# Altium PCB PCB_IOT_VER.1.1.1.PcbDoc
Units mm, origin at the board's own origin, x right, y up, seen from the top; angles counter-clockwise.
Board outline 201.68 x 192.66 mm, 2 copper layers (Top Layer, Bottom Layer); 82 components, 85 nets, 277 pads, 2 vias.
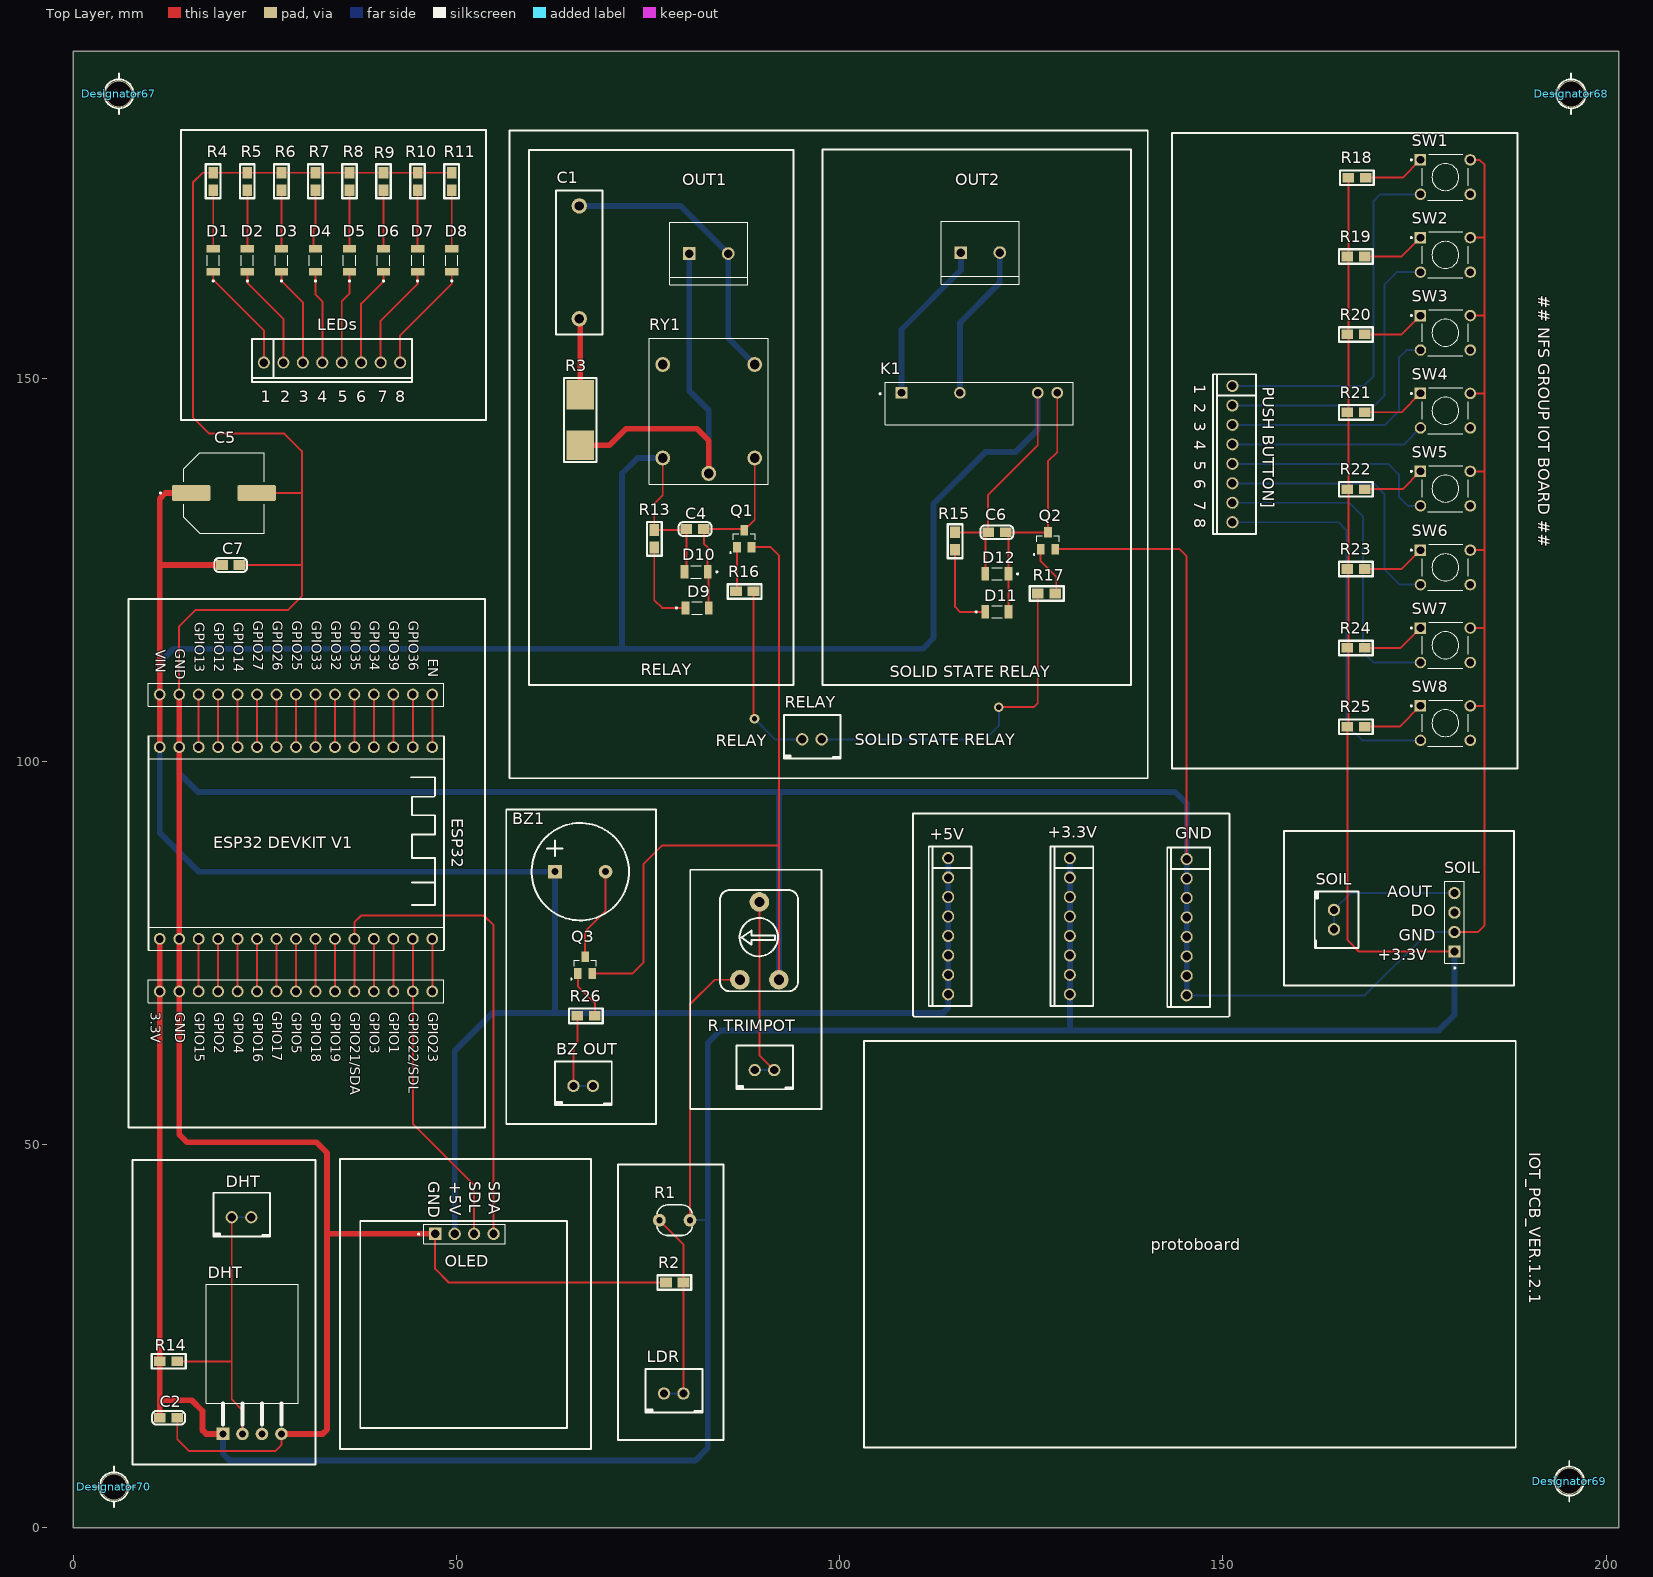
[diagram p0: Top Layer view]
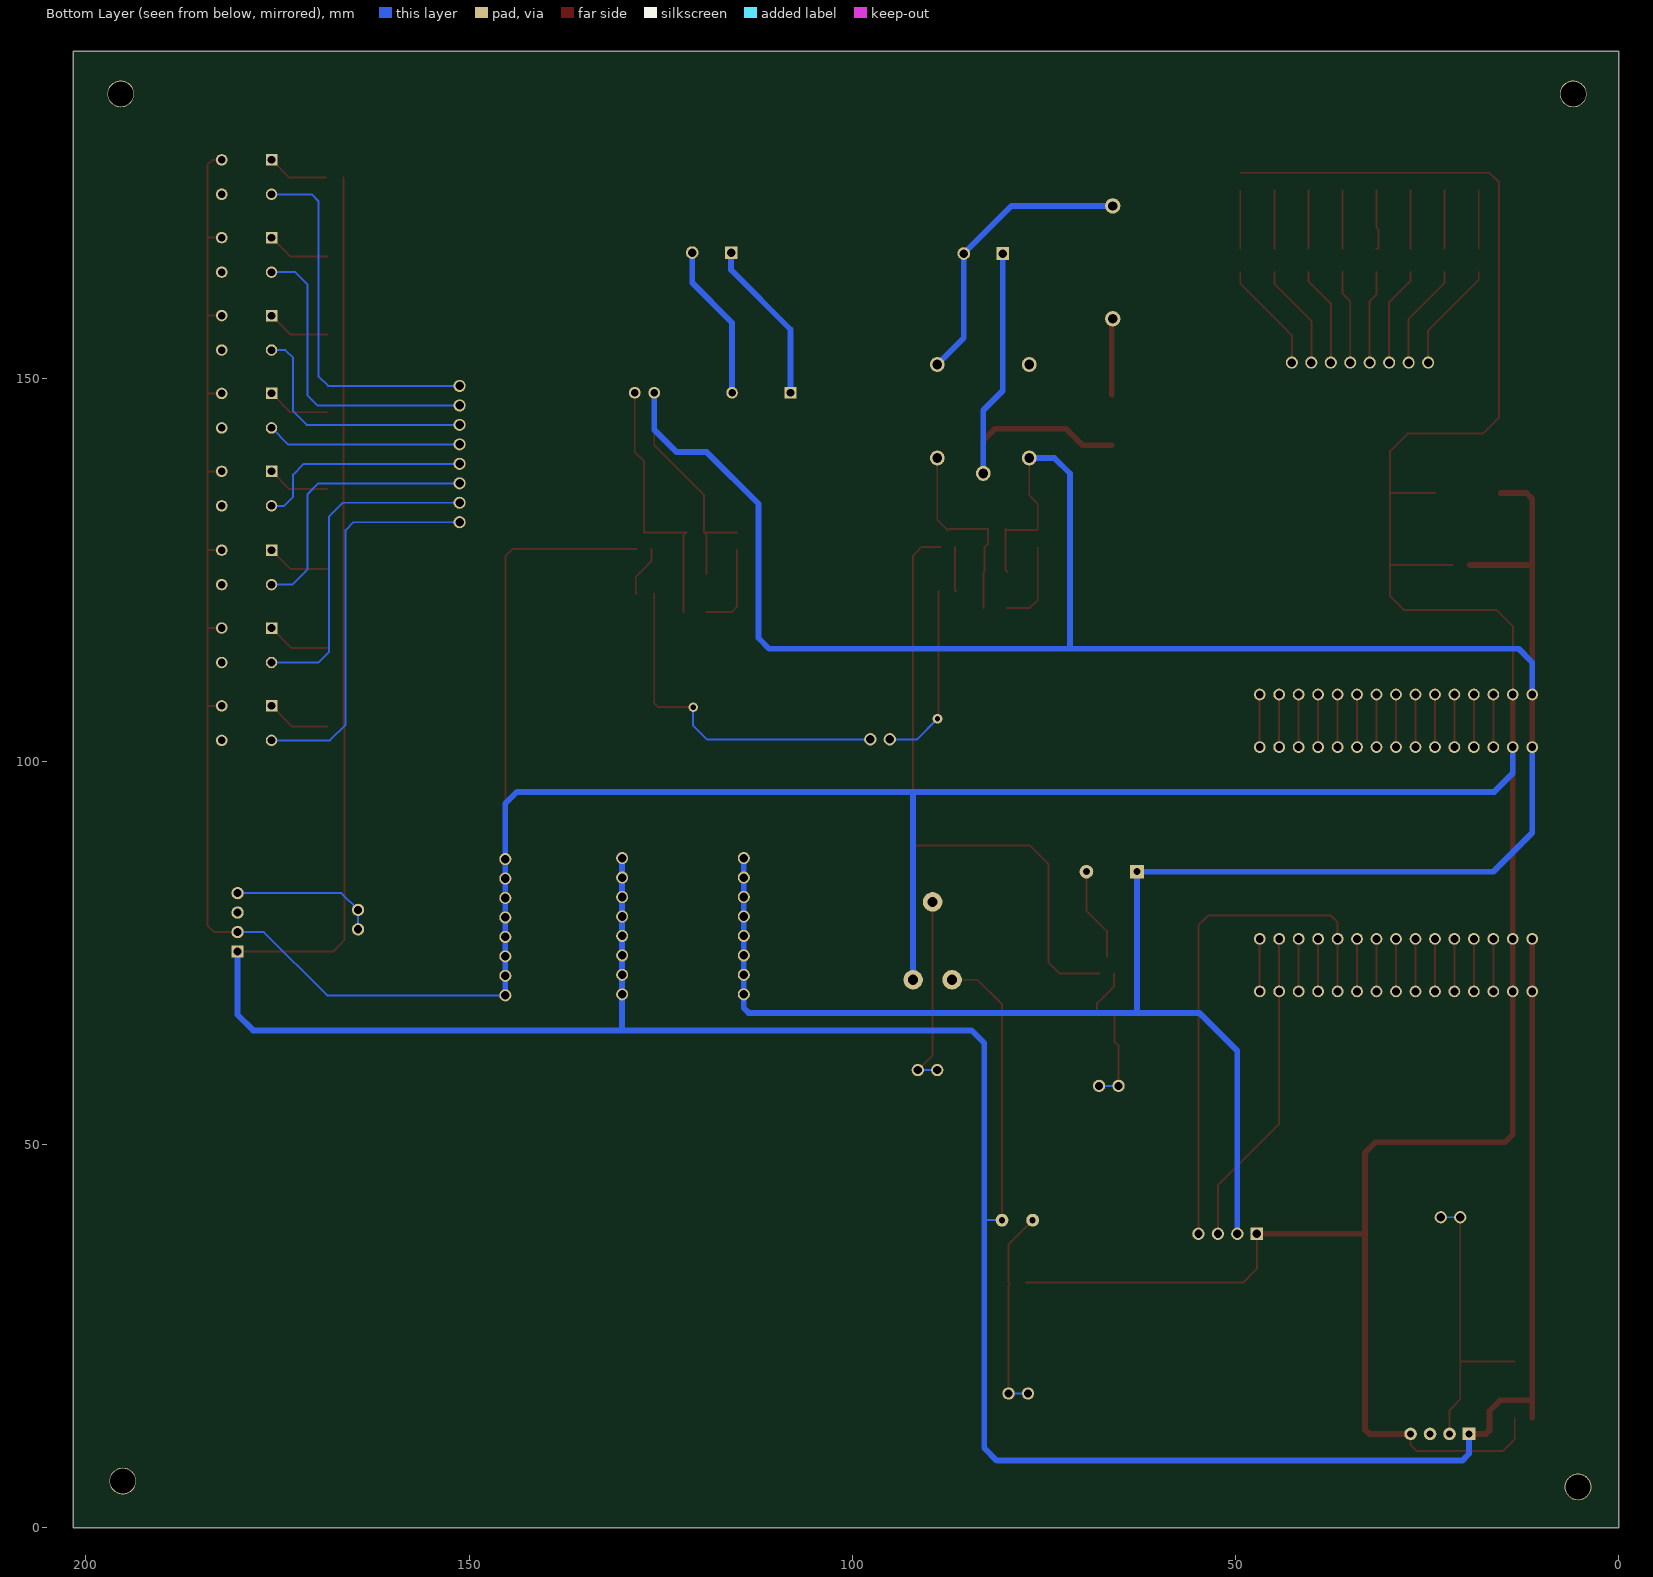
[diagram p1: Bottom Layer view, seen from below]

## Layer stack, top to bottom
Top Solder: solder mask 0.0102, Solder Resist, Dk 3.5
Top Layer: signal copper 0.0356
Dielectric 1: dielectric 0.32, FR-4, Dk 4.8
Bottom Layer: signal copper 0.0356
Bottom Solder: solder mask 0.0102, Solder Resist, Dk 3.5

## Board outline
0,0 201.676,0 201.676,192.659 0,192.659

## Design rules (kind name [scope] priority, off if disabled: settings)
Clearance [All] p1: gap=0.254 ignorepadtopadclearanceinfootprint=FALSE except(0: Arc-Hole Track-Hole SMDPad-Hole THPad-Hole Via-Hole Fill-Hole Poly-Hole Region-Hole Text-Hole)
PolygonConnect [All] p1: connectstyle=Relief reliefconductorwidth=0.254 reliefentries=4 polygonreliefangle="90 Angle" airgapwidth=0.254
RoutingVias [All] p1: holewidth=0.711 width=1.27 viastyle="Through Hole" minholewidth=0.711 minwidth=1.27 maxholewidth=0.711 maxwidth=1.27
SolderMaskExpansion [All] p1: expansion=0.102 istentingtop=FALSE
Width [All] p1: maxlimit=0.762 minlimit=0.254 preferedwidth=0.254 minimp=50.000000 maximp=50.000000 favimp=50.000000
30 further rules are at their usual default settings.

## Classes and differential pairs
component class IOT_ver.1: C1 C2 C4 C5 C6 C7 D1 D2 D3 D4 D5 D6 D7 D9 D10 D11 D12 K1 OUT1 OUT2 Q1 Q2 R1 R3 R4 R5 R6 R7 R8 R9 R10 R11 R13 R14 R15 R16 R17 SW1 SW2 SW3 SW4 SW5 SW6 SW7 SW8

## Components (designator, comment, footprint, x,y, rotation, side; value= is the part's Value field where it differs from the comment)
3 "PPTC151LFBN-RC" PPTC151LFBN-RC 11.303,69.977 r0 top
4 "PPTC151LFBN-RC" PPTC151LFBN-RC 46.863,76.835 r180 top
5 "PPTC151LFBN-RC" PPTC151LFBN-RC 11.303,101.854 r0 top
6 "PPTC151LFBN-RC" PPTC151LFBN-RC 46.863,108.712 r180 top
+3.3V "Comment" CON_SIP_WS(8) 130.048,87.376 r270 top
+5V "Comment" CON_SIP_WS(8) 114.173,87.376 r270 top
BZ1 "Comment" BUZZER 62.865,85.598 r0 top
"BZ OUT" "Comment" CON_2.5_2PIN 65.378,57.758 r0 top
C1 "CC0603JRNPO9BN221" C_0.1/250V 66.04,157.734 r90 top value="0.1 uf 250V"
C2 "CC0603JRNPO9BN221" 0805-C 11.303,14.351 r0 top value=0.1
C4 "CC0603JRNPO9BN221" 0805-C 82.296,130.302 r180 top value=0.1
C5 "MAL214699103E3" CAPAE1050X1050N 19.685,135.001 r0 top value=1000uF/16V
C6 "CC0603JRNPO9BN221" 0805-C 121.666,129.878 r180 top value=0.1
C7 "CC0603JRNPO9BN221" 0805-C 21.717,125.603 r180 top value=0.1uF/16V (schematic designator 2)
D1 "LHN974_RED_LED_1206" LEDC3216X120N 18.288,165.368 r90 top
D2 "LHN974_RED_LED_1206" LEDC3216X120N 22.733,165.368 r90 top
D3 "LHN974_RED_LED_1206" LEDC3216X120N 27.178,165.368 r90 top
D4 "LHN974_RED_LED_1206" LEDC3216X120N 31.623,165.368 r90 top
D5 "LHN974_RED_LED_1206" LEDC3216X120N 36.068,165.368 r90 top
D6 "LHN974_RED_LED_1206" LEDC3216X120N 40.513,165.368 r90 top
D7 "LHN974_RED_LED_1206" LEDC3216X120N 44.958,165.368 r90 top
D8 "LHN974_RED_LED_1206" LEDC3216X120N 49.403,165.368 r90 top
D9 "LHN974_RED_LED_1206" LEDC3216X120N 81.407,120.015 r0 top
D10 "LHN974_RED_LED_1206" LEDC3216X120N 81.28,124.714 r180 top
D11 "LHN974_RED_LED_1206" LEDC3216X120N 120.523,119.507 r0 top
D12 "LHN974_RED_LED_1206" LEDC3216X120N 120.523,124.46 r180 top
Designator67 "Comment" HOLD3.3 5.969,187.071 r180 top
Designator68 "Comment" HOLD3.3 195.453,187.071 r180 top
Designator69 "Comment" HOLD3.3 195.199,6.096 r180 top
Designator70 "Comment" HOLD3.3 5.334,5.334 r180 top
DHT "Comment" CON_2.5_2PIN 20.801,40.613 r0 top
DHT "TEM-HUM-DHT11(4P-15.5X12.0MM)" SNR4-2.54-15.5X12.0X5.5MM 23.368,24.003 r90 top (schematic designator DHT2)
GND "Comment" CON_SIP_WS(8) 145.288,87.249 r270 top
K1 "G3MB202PDC12" RELAY_G3MB202PDC12 118.237,146.685 r0 top
LDR "Comment" CON_2.5_2PIN 77.189,17.626 r0 top
LEDs "Comment" CON_SIP_WS(8) 24.892,152.019 r0 top
OLED "PPTC041LFBN-RC" SULLINS_PPTC041LFBN-RC 51.054,38.354 r0 top (schematic designator OLED1)
OUT1 "282837-2" TE_282837-2 82.931,166.243 r0 top (schematic designator OUT2)
OUT2 "282837-2" TE_282837-2 118.364,166.37 r0 top (schematic designator OUT4)
"PUSH BUTTON]" "Comment" CON_SIP_WS(8) 151.257,148.971 r270 top
Q1 "MMBT3904" SOT95P240X120-3N 87.569,129.032 r0 top
Q2 "MMBT3904" SOT95P240X120-3N 127.188,128.778 r0 top
Q3 "MMBT3904" SOT95P240X120-3N 66.802,73.406 r0 top (schematic designator Q1)
R1 "LDR" LDR 78.486,40.132 r180 top
R2 "RC0402JR-071R5L" 0805-R 77.343,32.004 r0 top value=10k
R3 "RC0402JR-071R5L" 2512-R 66.167,147.824 r270 top value=100
R4 "RC0402JR-071R5L" 0805-R 18.288,176.784 r270 top value=1k
R5 "RC0402JR-071R5L" 0805-R 22.733,176.784 r270 top value=1k
R6 "RC0402JR-071R5L" 0805-R 27.178,176.784 r270 top value=1k
R7 "RC0402JR-071R5L" 0805-R 31.623,176.784 r270 top value=1k
R8 "RC0402JR-071R5L" 0805-R 36.068,176.784 r270 top value=1k
R9 "RC0402JR-071R5L" 0805-R 40.513,176.784 r270 top value=1k
R10 "RC0402JR-071R5L" 0805-R 44.958,176.784 r270 top value=1k
R11 "RC0402JR-071R5L" 0805-R 49.403,176.784 r270 top value=1k
R13 "RC0402JR-071R5L" 0805-R 75.819,127.889 r90 top value=1k
R14 "RC0402JR-071R5L" 0805-R 13.589,21.717 r180 top value=1k
R15 "RC0402JR-071R5L" 0805-R 115.062,127.592 r90 top value=1k
R16 "RC0402JR-071R5L" 0805-R 86.487,122.174 r0 top value=3.3k
R17 "RC0402JR-071R5L" 0805-R 128.143,121.895 r180 top value=3.3k
R18 "RC0402JR-071R5L" 0805-R 166.37,176.149 r0 top value=1k
R19 "RC0402JR-071R5L" 0805-R 166.243,165.862 r0 top value=1k
R20 "RC0402JR-071R5L" 0805-R 166.243,155.702 r0 top value=1k
R21 "RC0402JR-071R5L" 0805-R 166.243,145.542 r0 top value=1k
R22 "RC0402JR-071R5L" 0805-R 166.243,135.509 r0 top value=1k
R23 "RC0402JR-071R5L" 0805-R 166.243,125.095 r0 top value=1k
R24 "RC0402JR-071R5L" 0805-R 166.243,114.808 r0 top value=1k
R25 "RC0402JR-071R5L" 0805-R 166.243,104.521 r0 top value=1k
R26 "RC0402JR-071R5L" 0805-R 65.786,66.802 r0 top value=3.3k (schematic designator R16)
"R TRIMPOT" "Comment" CON_2.5_2PIN 89.027,59.817 r0 top
RELAY "Comment" CON_2.5_2PIN 95.223,102.97 r0 top
RY1 "JQC-3F-1C-24VDC" RELAY_JQC-3F-1C-24VDC 82.931,145.669 r270 top
SOIL "Comment" CON_2.5_2PIN 164.592,80.518 r270 top
SOIL "PPTC041LFBN-RC" SULLINS_PPTC041LFBN-RC 180.213,78.994 r90 top (schematic designator SOIL1)
SW1 "1825910-6" SW_1825910-6-4 179.034,176.224 r0 top
SW2 "1825910-6" SW_1825910-6-4 179.034,166.064 r0 top
SW3 "1825910-6" SW_1825910-6-4 179.034,155.904 r0 top
SW4 "1825910-6" SW_1825910-6-4 179.034,145.744 r0 top
SW5 "1825910-6" SW_1825910-6-4 179.034,135.584 r0 top
SW6 "1825910-6" SW_1825910-6-4 179.034,125.297 r0 top
SW7 "1825910-6" SW_1825910-6-4 179.034,115.137 r0 top
SW8 "1825910-6" SW_1825910-6-4 179.034,104.977 r0 top
? "Comment" VR7 86.995,71.501 r0 top

## Footprints (in the part's own frame and the unit in brackets; to place one, negate y for a bottom-side part, rotate by r counter-clockwise, add the part's x,y. Pads: shape width x height; smd on the part's side, far side on the other; paste and mask are expansions set on the pad)
0805-C [mil]
  rect 60x50 smd: 1(0,0) 2(90,0)
  silkscreen extent -39,-35 130,35, body extent 4,-24 83,24, height 47
0805-R [mil]
  rect 60x50 smd: 1(0,0) 2(90,0)
  silkscreen extent -43,-38 131,37
2512-R [mil]
  rect 150x140 smd: 1(0,0) 2(259.84,0)
  silkscreen extent -87,-83 346,83, body extent 91,-29 169,21, height 20
BUZZER [mil]
  rect 70x70 hole 36: 1(0,0)
  round 70 hole 36: 2(260,0)
  silkscreen extent -120,-250 380,250
C_0.1/250V [mm]
  round 2 hole 1.2: 1(0,0) 2(14.732,0)
  silkscreen extent -2.03,-3.05 16.76,3.05, body extent -1.75,-4 16.75,2.8, height 15.16
CAPAE1050X1050N [mm]
  rrect25% 5.06x2.11 smd: 1(-4.275,0) 2(4.275,0)
  silkscreen extent -8.37,-5.25 5.25,5.25
CON_2.5_2PIN [mm]
  round 1.605 hole 1.07: 1(-0.1,-0.1) 2(2.44,-0.1)
  silkscreen extent -2.5,-2.6 4.9,3.1
CON_SIP_WS(8) [mil]
  round 62 hole 44: 1(0,0) 2(100,0) 3(200,0) 4(300,0) 5(400,0) 6(500,0) 7(600,0) 8(700,0)
  silkscreen extent -60,-100 760,120
HOLD3.3 [mm]
  round 3.5 hole 3.302: 0(0,0)
  silkscreen extent -2.65,-2.65 2.65,2.65
LDR [mm]
  round 1.676 hole 0.8: 1(-2,0) 2(2,0)
  silkscreen extent -2.3,-2 2.3,2
LEDC3216X120N [mm]
  rect 1.01x1.73 smd: NEG(1.51,0) POS(-1.51,0)
  silkscreen extent -2.8,-0.8 0.69,0.8
PPTC151LFBN-RC [mm]
  round 1.53 hole 1.02: P$1(0,0) P$2(2.54,0) P$3(5.08,0) P$4(7.62,0) P$5(10.16,0) P$6(12.7,0) P$7(15.24,0) P$8(17.78,0) P$9(20.32,0) P$10(22.86,0) P$11(25.4,0) P$12(27.94,0) P$13(30.48,0) P$14(33.02,0) P$15(35.56,0)
  silkscreen extent -1.5,-1.5 37.06,1.5
RELAY_G3MB202PDC12 [mm]
  rect 1.508x1.508 hole 1: 1(-10.16,1.4)
  round 1.508 hole 1: 2(-2.54,1.4) 3(7.62,1.4) 4(10.16,1.4)
  silkscreen extent -13.05,-2.75 12.25,2.75, body extent -12.25,-2.75 12.25,2.75, height 20.5
RELAY_JQC-3F-1C-24VDC [mm]
  round 1.95 hole 1.3: COIL1(6.1,6) COIL2(6.1,-6) COM(8.1,0) NC(-6.1,-6) NO(-6.1,6)
  silkscreen extent -9.5,-7.75 9.5,7.75
SNR4-2.54-15.5X12.0X5.5MM [mil]
  rect 65x65 hole 35: 1(-462.6,150)
  round 65 hole 35: 2(-462.6,50) 3(-462.6,-50) 4(-462.6,-150)
  silkscreen extent -413,-236 305,236
SOT95P240X120-3N [mm]
  rect 1x1.4 smd: 1(-0.95,-1.1) 2(0.95,-1.1) 3(0,1.1)
  silkscreen extent -1.9,-1.9 1.45,0.65
SULLINS_PPTC041LFBN-RC [mm]
  rect 1.605x1.605 / inner round 1.605 / far side rect 1.605x1.605 hole 1.07: 1(-3.81,0)
  round 1.605 hole 1.07: 2(-1.27,0) 3(1.27,0) 4(3.81,0)
  silkscreen extent -6.06,-1.27 5.33,1.27, body extent -5.33,-1.27 5.33,1.27, height 8.51
SW_1825910-6-4 [mm]
  rect 1.498x1.498 hole 0.99: 1(-3.25,2.25)
  round 1.498 hole 0.99: 2(3.25,2.25) 3(-3.25,-2.25) 4(3.25,-2.25)
  silkscreen extent -4.54,-2.99 3,2.99
TE_282837-2 [mm]
  rect 1.65x1.65 / inner round 1.65 / far side rect 1.65x1.65 hole 1.1: 1(-2.54,0)
  round 1.65 hole 1.1: 2(2.54,0)
  silkscreen extent -5.08,-4.1 5.08,4.1, body extent -5.68,0 5.08,8.2, height 7.25
VR7 [mil]
  round 100 hole 52: 1(0,0) 2(200,0) 3(100,400)
  silkscreen extent -102,-59 299,461

## Part data
3 4 5 6: "15 Position Header Connector Through Hole", Package=None, Availability=Unavailable, MF="Sullins Connector", MP=PPTC151LFBN-RC, Price=None, SnapEDA_Link=https://www.snapeda.com/parts/PPTC151LFBN-RC/Sullins%20Connector%20Solutions/view-part/592000/?ref=snap
C1 C2 C4 C6 C7: "220 pF ??5% 50V Ceramic Capacitor C0G, NP0 0603 (1608 Metric)", Package="0603 Yageo", Availability="In Stock", Check_prices=https://www.snapeda.com/parts/CC0603JRNPO9BN221/Yageo/view-part/?ref=eda, MF=Yageo, MP=CC0603JRNPO9BN221, Price=None, Purchase-URL=https://pricing.snapeda.com/search/part/CC0603JRNPO9BN221/?ref=eda, SnapEDA_Link=https://www.snapeda.com/parts/CC0603JRNPO9BN221/Yageo/view-part/?ref=snap
C5: "100??F 50V Aluminum Electrolytic Capacitors Radial, Can - SMD 1500 Hrs @ 125??C", Package="Radial Vishay BC", Digi-Key_Part_Number=4437PHCT-ND, DigiKey-Purchase-URL=https://snapeda.com/shop?store=DigiKey&id=285948, MF="Vishay BC", Mouser-Purchase-URL=https://snapeda.com/shop?store=Mouser&id=285948, MP=MAL214699103E3, SnapEDA_Link=https://www.snapeda.com/parts/MAL214699103E3/Vishay%20BC%20Components/view-part/285948/?ref=snap
D1 D2 D3 D4 D5 D6 D7 D8 D9 D10 D11 D12: "2.6 V Red LED SMD", Package=None, Availability="Not in stock", Check_prices=https://www.snapeda.com/parts/LHN974%20RED%20LED%201206/Osram/view-part/7899607/?ref=eda, MF=Osram, MP="LHN974 RED LED 1206", Price=None, SnapEDA_Link=https://www.snapeda.com/parts/LHN974%20RED%20LED%201206/Osram/view-part/7899607/?ref=snap
DHT: "Servo AC 100 ~ 120VAC Supply 10A 120V Load", Package=None, Availability="In Stock", Check_prices=https://www.snapeda.com/parts/DHT11/Panasonic/view-part/6618018/?ref=eda, MF="Panasonic Industrial Automation Sales", MP=DHT11, Price=None, Purchase-URL=https://pricing.snapeda.com/search/part/DHT11/?ref=eda, SnapEDA_Link=https://www.snapeda.com/parts/DHT11/Panasonic/view-part/6618018/?ref=snap
K1: "Solid State SPST-NO (1 Form A) 4-SIP", Package=None, Availability="Not in stock", Check_prices=https://www.snapeda.com/parts/G3MB-202P-DC12/Omron+Automation+and+Safety/view-part/?ref=eda, MF="Omron Automation", MP=G3MB-202P-DC12, Price=None, SnapEDA_Link=https://www.snapeda.com/parts/G3MB-202P-DC12/Omron+Automation+and+Safety/view-part/?ref=snap
OLED SOIL: "4 Position Header Connector 0.100 (2.54mm) Through Hole Tin", Package=None, Check_prices=https://www.snapeda.com/parts/PPTC041LFBN-RC/Sullins+Connector+Solutions/view-part/?ref=eda, Digi-Key_Part_Number=S7002-ND, MF="Sullins Connector", MP=PPTC041LFBN-RC, Purchase-URL=https://pricing.snapeda.com/search/part/PPTC041LFBN-RC/?ref=eda, SnapEDA_Link=https://www.snapeda.com/parts/PPTC041LFBN-RC/Sullins+Connector+Solutions/view-part/?ref=snap
OUT1 OUT2: "Connector Terminal Blocks Receptacle 2 Position 5.08mm Solder Straight Thru-Hole 13.5A/Contact", Package=None, Availability="In Stock", Check_prices=https://www.snapeda.com/parts/282837-2/TE+Connectivity+AMP+Connectors/view-part/?ref=eda, MF="TE Connectivity", MP=282837-2, Price=None, Purchase-URL=https://pricing.snapeda.com/search/part/282837-2/?ref=eda, SnapEDA_Link=https://www.snapeda.com/parts/282837-2/TE+Connectivity+AMP+Connectors/view-part/?ref=snap
Q1 Q2 Q3: "Bipolar _BJT_ Transistor NPN 40V 200mA 270MHz 350mW Surface Mount SOT-23-3", Package="SOT-23-3 Taiwan Semiconductor", Availability=Unavailable, MF=STMicroelectronics, MP=MMBT3904, Price=None, SnapEDA_Link=https://www.snapeda.com/parts/MMBT3904/STMicroelectronics/view-part/2875870/?ref=snap
R1: Package=None, Availability="In Stock", Check_prices=https://www.snapeda.com/parts/LDR/Applied+Avionics/view-part/?ref=eda, MF="Fairway Electronics", MP=LDR, Price=None, SnapEDA_Link=https://www.snapeda.com/parts/LDR/Applied+Avionics/view-part/?ref=snap
R2 R3 R4 R5 R6 R7 R8 R9 R10 R11 R13 R14 R15 R16 R17 R18 R19 R20 R21 R22 R23 R24 R25 R26: "1.5 Ohms ??5% 0.063W, 1/16W Chip Resistor 0402 (1005 Metric) Moisture Resistant Thick Film", Package="1005 Panasonic Electronic Components", Availability="In Stock", Check_prices=https://www.snapeda.com/parts/RC0402JR-071R5L/Yageo/view-part/?ref=eda, MF=Yageo, MP=RC0402JR-071R5L, Price=None, Purchase-URL=https://pricing.snapeda.com/search/part/RC0402JR-071R5L/?ref=eda, SnapEDA_Link=https://www.snapeda.com/parts/RC0402JR-071R5L/Yageo/view-part/?ref=snap
RY1: "Miniature PCB Relay 24VDC, 10A 250VAC, 15A 125VAC, 10A 250VAC", Package=None, Availability=Unavailable, MP=JQC-3F-1C-24VDC, Price=None
SW1 SW2 SW3 SW4 SW5 SW6 SW7 SW8: "Switch Tactile OFF (ON) SPST Round Button PC Pins 0.05A 24VDC 100000Cycles 1.57N Thru-Hole Loose", Package=None, Availability=Unavailable, MP=1825910-6, Price=None

## Free pads (board coordinates)
  round 2.5 hole 0.762: 3(5.334,5.334) 3(5.969,187.071) 3(195.199,6.096) 3(195.453,187.071)

## Via types
v1: diameter 1.27, hole 0.711, Top Layer to Bottom Layer, 2 vias

## Nets (pads, with @x,y where several pads share a name; then routed paths per layer and width w, separated by ;. In a path a pad name is that pad's centre, name@x,y a point inside that pad or via, vN(x,y) a via of type N, cw(c..) or ccw(c..) an arc to the next point about the centre after c; other vN are vias at no path point)
+3.3: 3.P$1 4.P$15 +3.3V.1 +3.3V.2 +3.3V.3 +3.3V.4 +3.3V.5 +3.3V.6 +3.3V.7 +3.3V.8 ?.1 C2.1 DHT.1@19.558,12.253 R1.1 R14.2 R18.1 R19.1 R20.1 R21.1 R22.1 R23.1 R24.1 R25.1 SOIL.1@180.213,75.184 | length 477.2
  Top Layer w0.254: 16.891,13.142 17.78,12.253 ; R1.1 80.486,68.294 83.693,71.501 ?.1 ; R18.1 166.37,155.702 166.37,145.542 166.37,104.648 R25.1 166.243,76.708 167.767,75.184 SOIL.1@180.213,75.184
  Top Layer w0.762: C2.1 11.303,16.637 ; 4.P$15 3.P$1 R14.2 11.303,16.637 ; DHT.1@19.558,12.253 17.78,12.253 17.338,12.253 16.891,12.7 16.891,13.142 16.891,15.24 15.494,16.637 11.303,16.637
  Bottom Layer w0.254: R1.1 82.804,40.132
  Bottom Layer w0.762: DHT.1@19.558,12.253 19.558,9.652 20.447,8.763 81.153,8.763 82.804,10.414 82.804,40.132 82.804,63.246 84.455,64.897 130.175,64.897 ; +3.3V.1 +3.3V.2 +3.3V.3 +3.3V.4 +3.3V.5 +3.3V.6 +3.3V.7 +3.3V.8 130.048,65.024 130.175,64.897 ; SOIL.1@180.213,75.184 180.213,66.929 178.181,64.897 130.175,64.897
+5: 5.P$1 6.P$15 +5V.1 +5V.2 +5V.3 +5V.4 +5V.5 +5V.6 +5V.7 +5V.8 BZ1.1 C4.2 C5.1 C6.2 C7.2 D10.NEG D12.NEG K1.3 OLED.2 R13.2 R15.2 RY1.COIL2 | length 479.4
  Top Layer w0.254: RY1.COIL2 76.931,134.716 75.819,133.604 R13.2 79.883,130.175 C4.2 80.01,124.954 D10.NEG ; R15.2 C6.2 ; D12.NEG 119.013,129.511 C6.2 ; K1.3 125.857,141.224 119.38,134.747 C6.2
  Top Layer w0.762: 5.P$1 6.P$15 11.303,125.603 ; C5.1 12.065,135.001 11.303,134.239 11.303,125.603 ; C7.2 11.303,125.603
  Bottom Layer w0.254: 49.784,61.976 54.737,66.929 62.865,66.929
  Bottom Layer w0.762: 5.P$1 11.303,90.678 16.383,85.598 BZ1.1 62.865,67.183 ; 6.P$15 11.303,112.903 13.081,114.681 71.628,114.681 ; OLED.2 49.784,61.976 49.784,62.23 54.737,67.183 62.865,67.183 ; RY1.COIL2 73.656,139.569 71.628,137.541 71.628,114.681 ; +5V.1 +5V.2 +5V.3 +5V.4 +5V.5 +5V.6 +5V.7 +5V.8 114.173,67.818 113.538,67.183 62.865,67.183 ; K1.3 125.857,143.256 122.936,140.335 118.999,140.335 112.268,133.604 112.268,116.078 110.871,114.681 71.628,114.681
GND: 3.P$2 4.P$14 5.P$2 6.P$14 ?.2 C2.2 C5.2 C7.1 DHT.4 GND.1 GND.2 GND.3 GND.4 GND.5 GND.6 GND.7 GND.8 OLED.1 Q1.2 Q2.2 Q3.2 R2.1 R4.1 R5.1 R6.1 R7.1 R8.1 R9.1 R10.1 R11.1 SOIL.2@180.213,77.724 SW1.2 SW2.2 SW3.2 SW4.2 SW5.2 SW6.2 SW7.2 SW8.2 | length 827.1
  Top Layer w0.254: C2.2 13.589,11.557 15.113,10.033 26.416,10.033 27.178,10.795 DHT.4 ; 6.P$14 13.843,117.602 16.002,119.761 28.067,119.761 29.845,121.539 29.845,125.603 ; C7.1 29.845,125.603 ; C5.2 29.845,135.001 ; OLED.1 47.244,33.782 49.022,32.004 R2.1 ; R11.1 R10.1 R9.1 R8.1 R7.1 R6.1 R5.1 R4.1 16.891,176.784 15.621,175.514 15.621,144.907 17.78,142.748 27.559,142.748 29.845,140.462 29.845,135.001 ; Q3.2 72.941,72.306 74.422,73.787 74.422,86.614 76.835,89.027 92.075,89.027 ; Q1.2 91.016,127.932 92.075,126.873 92.075,89.027 ; ?.2 92.075,89.027 ; Q2.2 144.356,127.678 145.288,126.746 GND.1 ; SOIL.2@180.213,77.724 183.261,77.724 184.15,78.613 184.15,107.188 ; SW8.2 184.111,107.227 184.15,107.188 ; SW7.2 184.111,117.387 184.15,117.348 ; SW6.2 184.062,127.547 184.15,127.635 ; SW5.2 184.062,137.834 184.15,137.922 ; SW4.2 184.111,147.994 184.15,147.955 ; SW3.2 184.111,158.154 184.15,158.115 ; SW2.2 184.111,168.314 184.15,168.275 ; SW1.2 183.476,178.474 184.15,177.8 184.15,168.275 ; 29.845,125.603 29.845,135.001 ; 184.15,107.188 184.15,117.348 ; 184.15,117.348 184.15,127.635 ; 184.15,127.635 184.15,137.922 ; 184.15,137.922 184.15,147.955 ; 184.15,147.955 184.15,158.115 ; 184.15,158.115 184.15,168.275
  Top Layer w0.762: 6.P$14 5.P$2 4.P$14 3.P$2 13.843,51.308 14.859,50.292 31.75,50.292 33.147,48.895 33.147,38.354 ; DHT.4 32.573,12.253 33.147,12.827 33.147,38.354 ; OLED.1 33.147,38.354
  Bottom Layer w0.254: GND.8 168.529,69.469 176.784,77.724 SOIL.2@180.213,77.724
  Bottom Layer w0.762: 5.P$2 13.843,98.425 16.256,96.012 92.075,96.012 ; ?.2 92.075,96.012 ; GND.8 GND.7 GND.6 GND.5 GND.4 GND.3 GND.2 GND.1 145.288,94.488 143.764,96.012 92.075,96.012
Net1_1: 
Net1_2: "R TRIMPOT.1" "R TRIMPOT.2" ?.3 | length 25.3
  Top Layer w0.254: ?.3 89.535,61.649 91.467,59.717
  Bottom Layer w0.254: 88.927,59.717 91.467,59.717
Net2_2: 
Net3_P$3: 3.P$3 4.P$13 | length 6.9
  Top Layer w0.254: 3.P$3 4.P$13
Net3_P$4: 3.P$4 4.P$12 | length 6.9
  Top Layer w0.254: 3.P$4 4.P$12
Net3_P$5: 3.P$5 4.P$11 | length 6.9
  Top Layer w0.254: 3.P$5 4.P$11
Net3_P$6: 3.P$6 4.P$10 | length 6.9
  Top Layer w0.254: 3.P$6 4.P$10
Net3_P$7: 3.P$7 4.P$9 | length 6.9
  Top Layer w0.254: 3.P$7 4.P$9
Net3_P$8: 3.P$8 4.P$8 | length 6.9
  Top Layer w0.254: 3.P$8 4.P$8
Net3_P$9: 3.P$9 4.P$7 | length 6.9
  Top Layer w0.254: 3.P$9 4.P$7
Net3_P$10: 3.P$10 4.P$6 | length 6.9
  Top Layer w0.254: 3.P$10 4.P$6
Net3_P$12: 3.P$12 4.P$4 | length 6.9
  Top Layer w0.254: 3.P$12 4.P$4
Net3_P$13: 3.P$13 4.P$3 | length 6.9
  Top Layer w0.254: 3.P$13 4.P$3
Net3_P$15: 3.P$15 4.P$1 | length 6.9
  Top Layer w0.254: 3.P$15 4.P$1
Net4_P$2: 3.P$14 4.P$2 OLED.3 | length 41.8
  Top Layer w0.254: 4.P$2 3.P$14 44.323,52.705 52.324,44.704 OLED.3
Net4_P$5: 3.P$11 4.P$5 OLED.4 | length 68.3
  Top Layer w0.254: 3.P$11 4.P$5 36.703,78.994 37.592,79.883 53.594,79.883 54.864,78.613 OLED.4
Net5_P$3: 5.P$3 6.P$13 | length 6.9
  Top Layer w0.254: 5.P$3 6.P$13
Net5_P$4: 5.P$4 6.P$12 | length 6.9
  Top Layer w0.254: 5.P$4 6.P$12
Net5_P$5: 5.P$5 6.P$11 | length 6.9
  Top Layer w0.254: 5.P$5 6.P$11
Net5_P$6: 5.P$6 6.P$10 | length 6.9
  Top Layer w0.254: 5.P$6 6.P$10
Net5_P$7: 5.P$7 6.P$9 | length 6.9
  Top Layer w0.254: 5.P$7 6.P$9
Net5_P$8: 5.P$8 6.P$8 | length 6.9
  Top Layer w0.254: 5.P$8 6.P$8
Net5_P$9: 5.P$9 6.P$7 | length 6.9
  Top Layer w0.254: 5.P$9 6.P$7
Net5_P$10: 5.P$10 6.P$6 | length 6.9
  Top Layer w0.254: 5.P$10 6.P$6
Net5_P$11: 5.P$11 6.P$5 | length 6.9
  Top Layer w0.254: 5.P$11 6.P$5
Net5_P$12: 5.P$12 6.P$4 | length 6.9
  Top Layer w0.254: 5.P$12 6.P$4
Net5_P$13: 5.P$13 6.P$3 | length 6.9
  Top Layer w0.254: 5.P$13 6.P$3
Net5_P$14: 5.P$14 6.P$2 | length 6.9
  Top Layer w0.254: 5.P$14 6.P$2
Net5_P$15: 5.P$15 6.P$1 | length 6.9
  Top Layer w0.254: 5.P$15 6.P$1
Net_Q3_1: Q3.1 R26.2 | length 6.4
  Top Layer w0.254: Q3.1 65.852,70.673 68.072,68.453 R26.2
NetBZ1_P: "BZ OUT.1" "BZ OUT.2" R26.1 | length 11.9
  Top Layer w0.254: 65.278,57.658 65.278,62.865 65.786,63.373 R26.1
  Bottom Layer w0.254: 65.278,57.658 67.818,57.658
NetC1_1: C1.1 R3.1 | length 10
  Top Layer w0.762: C1.1 66.167,157.607 R3.1
NetC1_2: C1.2 OUT1.2 RY1.NO | length 37.9
  Bottom Layer w0.762: C1.2 79.248,172.466 OUT1.2 85.471,155.229 RY1.NO
NetC3_1: 
NetC3_2: K1.2 OUT2.2 | length 20.4
  Bottom Layer w0.762: K1.2 115.697,157.226 120.904,162.433 OUT2.2
NetC4_1: C4.1 D9.NEG D10.POS Q1.3 RY1.COIL1 | length 25.9
  Top Layer w0.254: D9.NEG 82.917,124.587 D10.POS 82.79,127.903 82.296,128.397 C4.1 87.399,130.302 Q1.3 88.931,131.494 RY1.COIL1
NetC6_1: C6.1 D11.NEG D12.POS K1.4 Q2.3 | length 34.8
  Top Layer w0.254: D11.NEG D12.POS 122.033,129.511 C6.1 Q2.3 127.188,139.126 128.397,140.335 K1.4
NetD1_NEG: D1.NEG R4.2 | length 7.6
  Top Layer w0.254: D1.NEG R4.2
NetD1_POS: D1.POS LEDs.1 | length 14.6
  Top Layer w0.254: D1.POS 18.288,162.814 24.892,156.21 LEDs.1
NetD2_NEG: D2.NEG R5.2 | length 7.6
  Top Layer w0.254: D2.NEG R5.2
NetD2_POS: D2.POS LEDs.2 | length 13.8
  Top Layer w0.254: D2.POS 22.733,162.433 27.432,157.734 LEDs.2
NetD3_NEG: D3.NEG R6.2 | length 7.6
  Top Layer w0.254: D3.NEG R6.2
NetD3_POS: D3.POS LEDs.3 | length 13
  Top Layer w0.254: D3.POS 27.178,162.687 29.972,159.893 LEDs.3
NetD4_NEG: D4.NEG R7.2 | length 7.9
  Top Layer w0.254: D4.NEG 31.392,166.878 31.392,169.388 31.623,169.619 R7.2
NetD4_POS: D4.POS LEDs.4 | length 12.2
  Top Layer w0.254: D4.POS 31.623,160.909 32.512,160.02 LEDs.4
NetD5_NEG: D5.NEG R8.2 | length 7.6
  Top Layer w0.254: D5.NEG R8.2
NetD5_POS: D5.POS LEDs.5 | length 12.3
  Top Layer w0.254: LEDs.5 35.052,160.02 36.068,161.036 D5.POS
NetD6_NEG: D6.NEG R9.2 | length 7.6
  Top Layer w0.254: D6.NEG R9.2
NetD6_POS: D6.POS LEDs.6 | length 13
  Top Layer w0.254: LEDs.6 37.592,159.716 40.513,162.637 D6.POS
NetD7_NEG: D7.NEG R10.2 | length 7.6
  Top Layer w0.254: D7.NEG R10.2
NetD7_POS: D7.POS LEDs.7 | length 13.8
  Top Layer w0.254: LEDs.7 40.132,157.48 44.958,162.306 D7.POS
NetD8_NEG: D8.NEG R11.2 | length 7.6
  Top Layer w0.254: D8.NEG R11.2
NetD8_POS: D8.POS LEDs.8 | length 14.6
  Top Layer w0.254: LEDs.8 42.672,155.575 49.403,162.306 D8.POS
NetD9_POS: D9.POS R13.1 | length 11.4
  Top Layer w0.254: R13.1 75.819,121.031 76.835,120.015 D9.POS
NetD11_POS: D11.POS R15.1 | length 11.7
  Top Layer w0.254: R15.1 115.062,120.142 115.697,119.507 D11.POS
NetDHT1_1: LDR.1 LDR.2 R1.2 R2.2 | length 26.3
  Top Layer w0.254: R1.2 79.629,36.989 R2.2 ; R2.2@79.438,31.813 79.629,31.623 LDR.2
  Bottom Layer w0.254: LDR.1 LDR.2
NetDHT2_2: DHT.1@20.701,40.513 DHT.2 R14.1 | length 38.5
  Top Layer w0.254: R14.1 20.701,21.717 ; DHT.1@20.701,40.513 20.701,21.717 ; DHT.2@22.098,12.253 22.098,15.367 20.701,16.764 20.701,21.717
  Bottom Layer w0.254: DHT.1@20.701,40.513 DHT.2@23.241,40.513
NetDHT2_3: DHT.3
NetJ17_1: "PUSH BUTTON].1" SW1.3 | length 48.3
  Bottom Layer w0.254: 151.257,148.971 168.402,148.971 169.672,150.241 169.672,173.101 170.545,173.974 SW1.3
NetJ17_2: "PUSH BUTTON].2" SW2.3 | length 40.2
  Bottom Layer w0.254: 151.257,146.431 169.799,146.431 171.069,147.701 171.069,162.179 172.704,163.814 SW2.3
NetJ18_1: "PUSH BUTTON].3" SW3.3 | length 32.7
  Bottom Layer w0.254: 151.257,143.891 171.196,143.891 172.974,145.669 172.974,152.654 173.974,153.654 SW3.3
NetJ18_2: "PUSH BUTTON].4" SW4.3 | length 25.4
  Bottom Layer w0.254: 151.257,141.351 173.641,141.351 SW4.3
NetJ19_1: "PUSH BUTTON].5" SW5.3 | length 28.5
  Bottom Layer w0.254: 151.257,138.811 171.577,138.811 172.974,137.414 172.974,134.493 174.133,133.334 SW5.3
NetJ19_2: "PUSH BUTTON].6" SW6.3 | length 35.7
  Bottom Layer w0.254: 151.257,136.271 169.672,136.271 171.069,134.874 171.069,125.079 173.101,123.047 SW6.3
NetJ20_1: "PUSH BUTTON].7" SW7.3 | length 43.5
  Bottom Layer w0.254: 151.257,133.731 166.497,133.731 168.275,131.953 168.275,114.3 169.688,112.887 SW7.3
NetJ20_2: "PUSH BUTTON].8" SW8.3 | length 51.2
  Bottom Layer w0.254: 151.257,131.191 165.1,131.191 166.116,130.175 166.116,104.775 168.164,102.727 SW8.3
NetK1_1: K1.1 OUT2.1 | length 21.5
  Bottom Layer w0.762: K1.1 108.077,156.337 115.824,164.084 OUT2.1
NetOUT2_1: OUT1.1 R3.2 RY1.COM | length 52.3
  Top Layer w0.762: R3.2 69.977,141.224 72.136,143.383 81.407,143.383 82.931,141.859 RY1.COM
  Bottom Layer w0.762: OUT1.1 80.391,148.336 82.931,145.796 RY1.COM
NetQ1_1: Q1.1 R16.1 | length 5.8
  Top Layer w0.254: R16.1 86.619,122.306 Q1.1
NetQ2_1: Q2.1 R17.1 | length 6.7
  Top Layer w0.254: Q2.1 126.238,126.111 128.27,124.079 128.27,122.022 R17.1
NetQ3_3: BZ1.2 Q3.3 | length 12.2
  Top Layer w0.254: Q3.3 66.802,77.851 69.469,80.518 BZ1.2
NetR16_2: R16.2 RELAY.1 | length 24
  Top Layer w0.254: R16.2 88.773,105.664 v1(88.9,105.537)
  Bottom Layer w0.254: v1(88.9,105.537) 91.567,102.87 RELAY.1
NetR17_2: R17.2 RELAY.2 | length 45.9
  Top Layer w0.254: v1(120.777,107.061) 125.349,107.061 125.857,107.569 R17.2
  Bottom Layer w0.254: RELAY.2 118.999,102.87 120.777,104.648 v1(120.777,107.061)
NetR18_2: R18.2 SW1.1 | length 8.1
  Top Layer w0.254: R18.2 173.459,176.149 SW1.1
NetR19_2: R19.2 SW2.1 | length 8.3
  Top Layer w0.254: R19.2 173.332,165.862 SW2.1
NetR20_2: R20.2 SW3.1 | length 8.3
  Top Layer w0.254: R20.2 173.332,155.702 SW3.1
NetR21_2: R21.2 SW4.1 | length 8.3
  Top Layer w0.254: R21.2 173.332,145.542 SW4.1
NetR22_2: R22.2 SW5.1 | length 8.2
  Top Layer w0.254: R22.2 173.459,135.509 SW5.1
NetR23_2: R23.2 SW6.1 | length 8.3
  Top Layer w0.254: R23.2 173.332,125.095 SW6.1
NetR24_2: R24.2 SW7.1 | length 8.3
  Top Layer w0.254: R24.2 173.205,114.808 SW7.1
NetR25_2: R25.2 SW8.1 | length 8.4
  Top Layer w0.254: R25.2 173.078,104.521 SW8.1
NetSOIL1_4: SOIL.1@164.492,80.618 SOIL.2@164.492,78.078 SOIL.4 | length 19.2
  Bottom Layer w0.254: SOIL.2@164.492,78.078 164.492,80.618 166.678,82.804 SOIL.4
pads on no net: Designator67.0 Designator68.0 Designator69.0 Designator70.0 RY1.NC SOIL.3 SW1.4 SW2.4 SW3.4 SW4.4 SW5.4 SW6.4 SW7.4 SW8.4

## Silkscreen, mask and mechanical layers (free items; w line width, h text height)
Top Overlay:
  lines w0.254: 9.83,75.463 9.83,103.251 ; 44.069,97.917 47.244,97.917 47.244,95.504 ; 44.196,81.28 47.244,81.28 47.244,84.201 ; 44.196,84.201 47.244,84.201 ; 47.117,95.377 44.196,95.377 44.196,92.964 47.244,92.964 47.244,90.424 44.196,90.424 44.196,87.376 47.244,87.376 47.244,84.201 ; 48.363,75.439 48.363,103.227 ; 7.239,52.197 53.721,52.197 53.721,121.158 7.239,121.158 7.239,52.197 ; 7.747,8.255 7.747,48.006 31.623,48.006 31.623,8.255 7.747,8.255 ; 14.097,144.526 53.848,144.526 53.848,182.372 14.097,182.372 14.097,144.526 ; 34.798,10.287 34.798,48.133 67.564,48.133 67.564,10.287 34.798,10.287 ; 37.465,13.03 37.465,40.005 64.44,40.005 64.44,13.03 37.465,13.03 ; 56.515,52.705 56.515,93.726 76.073,93.726 76.073,52.705 56.515,52.705 ; 56.944,97.79 140.208,97.79 140.208,182.274 56.944,182.274 56.944,97.79 ; 59.484,109.982 59.484,179.734 93.98,179.734 93.98,109.982 59.484,109.982 ; 71.12,11.43 71.12,47.371 84.836,47.371 84.836,11.43 71.12,11.43 ; 80.518,54.61 80.518,85.852 97.663,85.852 97.663,54.61 80.518,54.61 ; 97.783,109.982 138.049,109.982 138.049,179.832 97.783,179.832 97.783,109.982 ; 103.2,10.49 103.2,63.5 188.214,63.5 188.214,10.49 103.2,10.49 ; 109.601,66.824 109.601,93.218 150.749,93.218 150.876,93.091 150.876,66.824 150.727,66.675 109.75,66.675 109.601,66.824 ; 143.383,99.06 143.383,181.991 188.468,181.991 188.468,99.06 143.383,99.06 ; 157.988,70.739 157.988,90.932 187.96,90.932 187.96,70.739 157.988,70.739
  text "## NFS GROUP IOT BOARD ##" at 191.135,160.782 h1.52 r270
  text "1" at 146.304,149.225 h1.52 r270
  text "1" at 24.511,146.812 h1.52
  text "2" at 27.051,146.812 h1.52
  text "3" at 29.464,146.812 h1.52
  text "4" at 31.877,146.812 h1.52
  text "5" at 34.544,146.812 h1.52
  text "6" at 36.957,146.812 h1.52
  text "7" at 39.751,146.812 h1.52
  text "8" at 42.037,146.812 h1.52
  text "2" at 146.304,146.685 h1.52 r270
  text "3" at 146.304,144.272 h1.52 r270
  text "4" at 146.304,141.859 h1.52 r270
  text "5" at 146.304,139.192 h1.52 r270
  text "6" at 146.304,136.779 h1.52 r270
  text "7" at 146.304,133.985 h1.52 r270
  text "8" at 146.304,131.699 h1.52 r270
  text "GPIO27" at 23.495,118.364 h1.27 r270
  text "GPIO26" at 26.035,118.364 h1.27 r270
  text "GPIO25" at 28.575,118.364 h1.27 r270
  text "GPIO33" at 31.115,118.364 h1.27 r270
  text "GPIO32" at 33.655,118.364 h1.27 r270
  text "GPIO35" at 36.195,118.364 h1.27 r270
  text "GPIO34" at 38.735,118.364 h1.27 r270
  text "GPIO39" at 41.275,118.364 h1.27 r270
  text "GPIO36" at 43.815,118.364 h1.27 r270
  text "GPIO13" at 15.875,118.11 h1.27 r270
  text "GPIO12" at 18.415,118.11 h1.27 r270
  text "GPIO14" at 20.955,118.11 h1.27 r270
  text "GND" at 13.335,114.681 h1.27 r270
  text "VIN" at 10.795,114.554 h1.27 r270
  text "EN" at 46.355,113.411 h1.27 r270
  text "RELAY" at 74.041,111.252 h1.52
  text "SOLID STATE RELAY" at 106.553,110.998 h1.52
  text "SOLID STATE RELAY" at 101.981,102.108 h1.52
  text "RELAY" at 83.82,101.981 h1.52
  text "ESP32" at 49.403,92.583 h1.52 r270
  text "ESP32 DEVKIT V1" at 18.288,88.646 h1.52
  text "AOUT" at 171.45,82.296 h1.52
  text "DO" at 174.498,79.756 h1.52
  text "GND" at 172.974,76.581 h1.52
  text "+3.3V" at 170.18,74.041 h1.52
  text "GPIO17" at 26.015,67.419 h1.27 r270
  text "3.3V" at 10.14,67.292 h1.27 r270
  text "GND" at 13.315,67.292 h1.27 r270
  text "GPIO15" at 15.855,67.292 h1.27 r270
  text "GPIO2" at 18.395,67.292 h1.27 r270
  text "GPIO4" at 20.935,67.292 h1.27 r270
  text "GPIO16" at 23.475,67.292 h1.27 r270
  text "GPIO5" at 28.555,67.292 h1.27 r270
  text "GPIO18" at 31.095,67.292 h1.27 r270
  text "GPIO19" at 33.635,67.292 h1.27 r270
  text "GPIO21/SDA" at 36.175,67.292 h1.27 r270
  text "GPIO3" at 38.715,67.292 h1.27 r270
  text "GPIO1" at 41.255,67.292 h1.27 r270
  text "GPIO22/SDL" at 43.795,67.292 h1.27 r270
  text "GPIO23" at 46.335,67.292 h1.27 r270
  text "IOT_PCB_VER.1.2.1" at 189.992,49.022 h1.52 r270
  text "GND" at 46.355,45.212 h1.52 r270
  text "+5V" at 49.149,45.212 h1.52 r270
  text "SDL" at 51.689,45.212 h1.52 r270
  text "SDA" at 54.229,45.212 h1.52 r270
  text "protoboard" at 140.589,36.195 h1.52